# EAGLE board budik-panel (EAGLE 9.2.2)
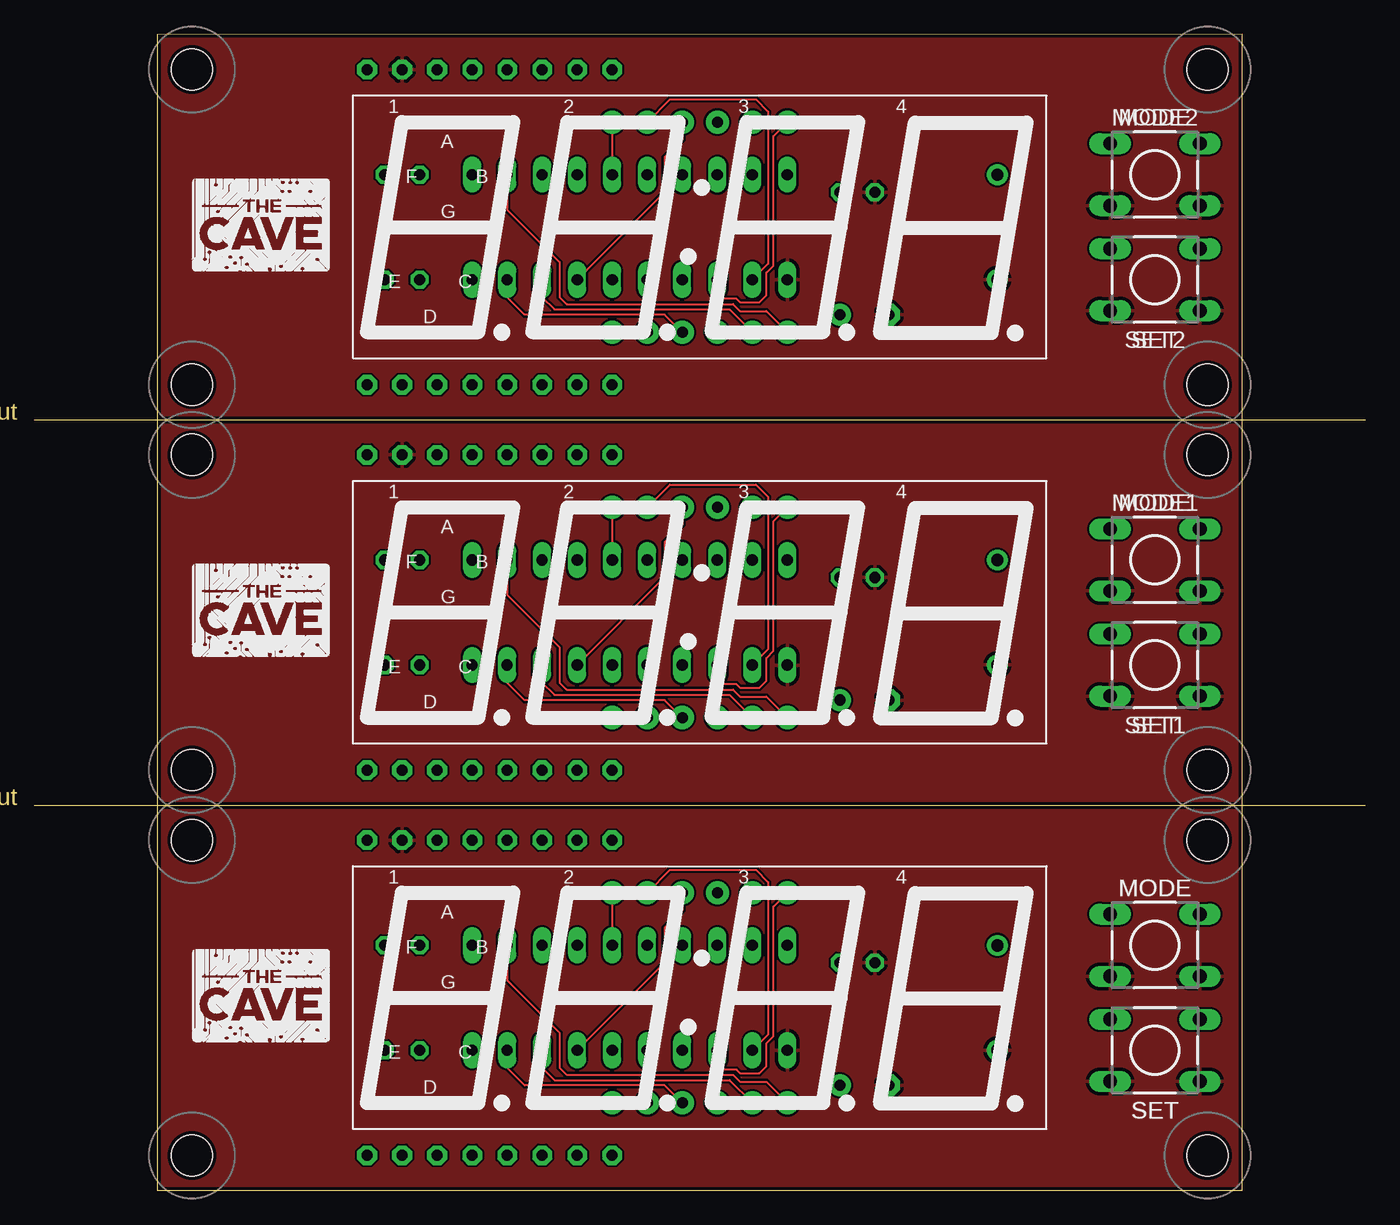
[diagram p0: board, top side]
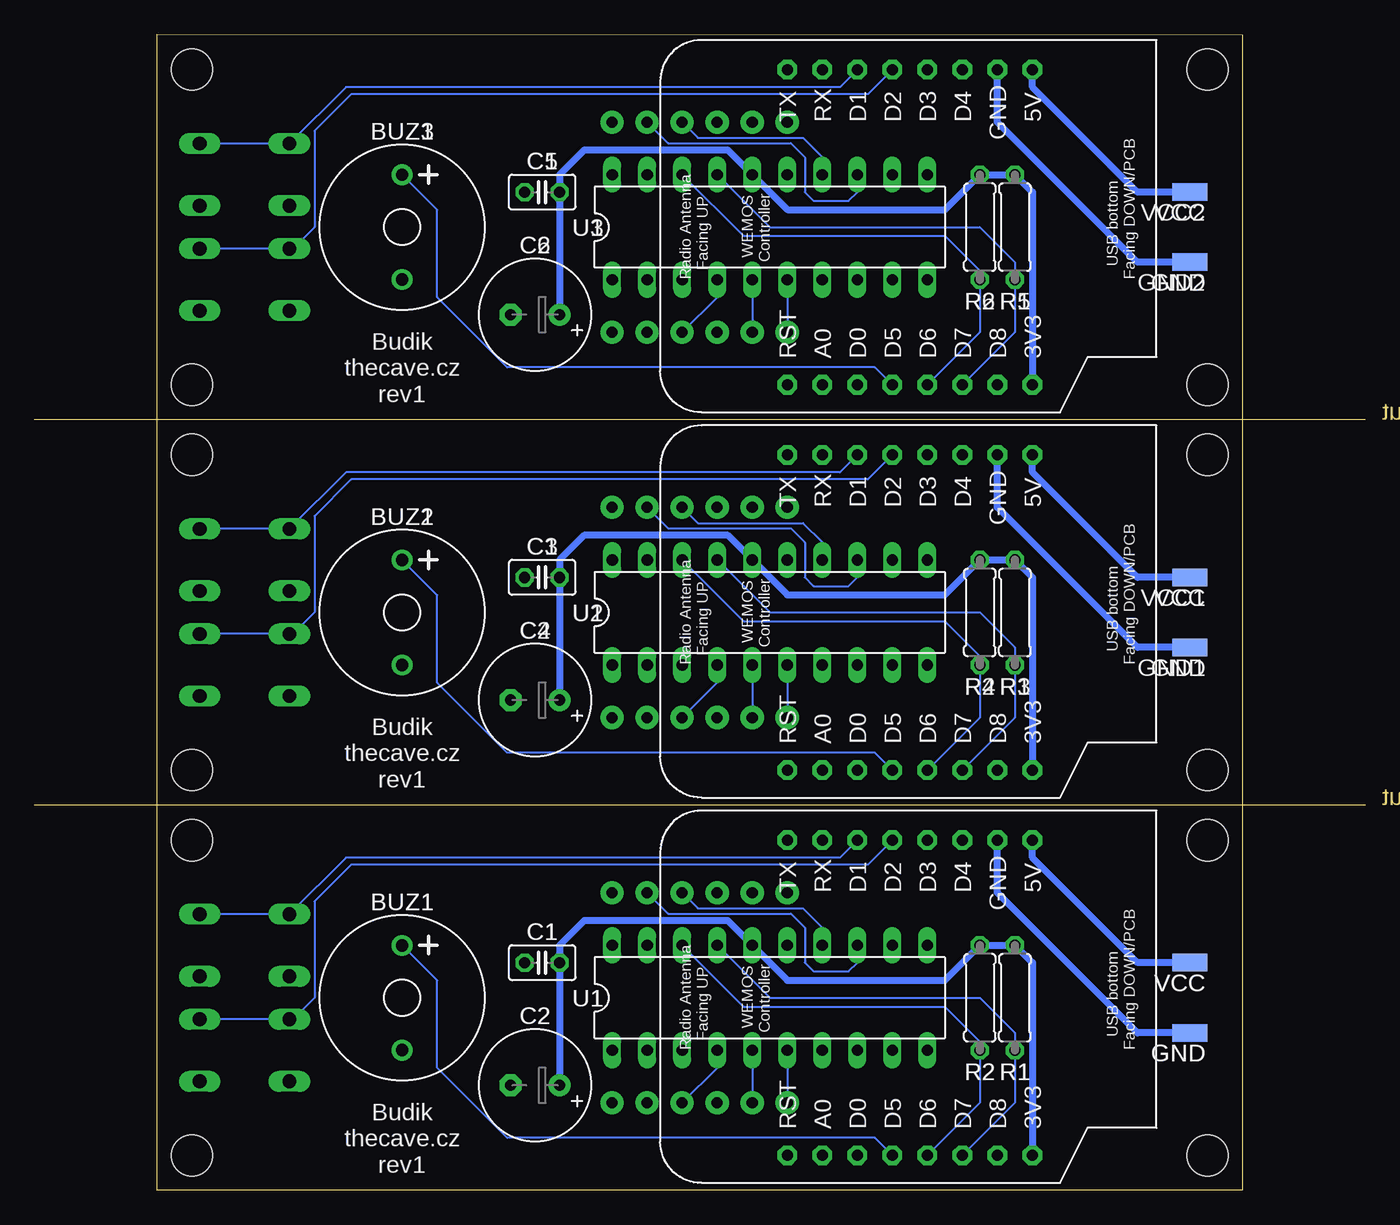
[diagram p1: board, bottom side, seen from below]

Size 96.52 x 83.82 mm. Coordinates in mm from the lower left corner, seen from the top.
Outline: 87.63,27.94 87.63,0.01 8.89,0 8.89,27.94
Outline: 87.63,27.95 87.63,55.88
Outline: 8.89,55.88 8.89,27.94
Outline: 87.63,55.88 87.63,83.82 8.89,83.82 8.89,55.88
Outline: 0,55.88 96.52,55.88
Outline: 0,27.94 96.52,27.94
Copper layers (1*16): Top 0.035mm / dielectric 1.5mm / Bottom 0.035mm
Design rules "SeeedStudio_2layer_DRU_no_angle_20140221": minimum track width 6mil, minimum drill 12mil, track to track 6mil, track to pad 6mil, pad to pad 6mil, via to via 6mil, smd to smd 0mil, copper to edge 10mil, drill to drill 10mil, minimum pad ring 10mil, minimum via ring 6mil, stop-mask expansion 2mil, vias tented up to drill 100mil, thermal gap 10mil
Holes 3 mm at 11.43,25.4 11.43,2.54 85.09,2.54 85.09,25.4 11.43,53.34 11.43,30.48 85.09,30.48 85.09,53.34 11.43,81.28 11.43,58.42 85.09,58.42 85.09,81.28

## Footprints (pad centres in the part's own frame; a part is rotated, then mirrored left to right if it is on the bottom)
BZ2-7.6-D12.0XH6.5MM = drill 0.9 pad 1.5: + -3.8,0; - 3.8,0
C025-025X050 = drill 0.813 octagon: 1 -1.27,0; 2 1.27,0
E3,5-8 = drill 0.813 pad 1.6: + -1.778,0 | drill 0.813 pad 1.6 octagon: - 1.778,0
SMD1,27-2,54 = smd 1.27 x 2.54: 1 0,0
DTS-6 = drill 1 long: 1 -3.25,2.25; 2 3.25,2.25; 3 -3.25,-2.25; 4 3.25,-2.25
0207/7 = drill 0.813 octagon: 1 -3.81,0; 2 3.81,0
DIL20 = drill 0.813 long: 1 -11.43,-3.81; 2 -8.89,-3.81; 3 -6.35,-3.81; 4 -3.81,-3.81; 5 -1.27,-3.81; 6 1.27,-3.81; 7 3.81,-3.81; 8 6.35,-3.81; 9 8.89,-3.81; 10 11.43,-3.81; 11 11.43,3.81; 12 8.89,3.81; 13 6.35,3.81; 14 3.81,3.81; 15 1.27,3.81; 16 -1.27,3.81; 17 -3.81,3.81; 18 -6.35,3.81; 19 -8.89,3.81; 20 -11.43,3.81
DISPLAY = drill 0.8 pad 1.676: A -3.806,7.62; B 6.354,7.62; C 1.274,-7.62; CA1 -6.346,7.62; CA2 1.274,7.62; CA3 3.814,7.62; CA4 6.354,-7.62; D -3.806,-7.62; DP -1.266,-7.62; E -6.346,-7.62; F -1.266,7.62; G 3.814,-7.62
WEMOS = drill 0.8 pad 1.422 octagon: 3V3 0,0; 5V 22.86,0; A0 0,15.24; D0 0,12.7; D1 22.86,12.7; D2 22.86,10.16; D3 22.86,7.62; D4 22.86,5.08; D5 0,10.16; D6 0,7.62; D7 0,5.08; D8 0,2.54; GND 22.86,2.54; RST 0,17.78; RX 22.86,15.24; TX 22.86,17.78

## Placement (x,y rotation side)
BUZ1  KS-12065D03YA  [BZ2-7.6-D12.0XH6.5MM]  69.85,13.97 270 bottom
BUZ2  KS-12065D03YA  [BZ2-7.6-D12.0XH6.5MM]  69.85,41.91 270 bottom
BUZ3  KS-12065D03YA  [BZ2-7.6-D12.0XH6.5MM]  69.85,69.85 270 bottom
C1  100n  [C025-025X050]  59.69,16.51 180 bottom
C2  100u  [E3,5-8]  60.2,7.62 180 bottom
C3  100n  [C025-025X050]  59.69,44.45 180 bottom
C4  100u  [E3,5-8]  60.2,35.56 180 bottom
C5  100n  [C025-025X050]  59.69,72.39 180 bottom
C6  100u  [E3,5-8]  60.2,63.5 180 bottom
GND  [SMD1,27-2,54]  12.7,11.43 90 bottom
GND1  [SMD1,27-2,54]  12.7,39.37 90 bottom
GND2  [SMD1,27-2,54]  12.7,67.31 90 bottom
MODE  DTS-6  [DTS-6]  81.28,17.78 0 top
MODE1  DTS-6  [DTS-6]  81.28,45.72 0 top
MODE2  DTS-6  [DTS-6]  81.28,73.66 0 top
R1  10k  [0207/7]  25.4,13.97 90 bottom
R2  10k  [0207/7]  27.94,13.97 90 bottom
R3  10k  [0207/7]  25.4,41.91 90 bottom
R4  10k  [0207/7]  27.94,41.91 90 bottom
R5  10k  [0207/7]  25.4,69.85 90 bottom
R6  10k  [0207/7]  27.94,69.85 90 bottom
SET  DTS-6  [DTS-6]  81.28,10.16 0 top
SET1  DTS-6  [DTS-6]  81.28,38.1 0 top
SET2  DTS-6  [DTS-6]  81.28,66.04 0 top
U1  TM1637_DIP  [DIL20]  43.18,13.97 0 bottom
U2  TM1637_DIP  [DIL20]  43.18,41.91 0 bottom
U3  TM1637_DIP  [DIL20]  43.18,69.85 0 bottom
U$1  NFD-5642BX  [DISPLAY]  48.26,13.97 0 top
U$2  THECAVE_LOGO_NEW_TOP_SMALL  [NEW_LOGO_SMALL_TOP]  11.43,10.79 0 top
U$3  WEMOS  [WEMOS]  24.13,2.54 90 bottom
U$4  NFD-5642BX  [DISPLAY]  48.26,41.91 0 top
U$5  THECAVE_LOGO_NEW_TOP_SMALL  [NEW_LOGO_SMALL_TOP]  11.43,38.73 0 top
U$6  WEMOS  [WEMOS]  24.13,30.48 90 bottom
U$7  NFD-5642BX  [DISPLAY]  48.26,69.85 0 top
U$8  THECAVE_LOGO_NEW_TOP_SMALL  [NEW_LOGO_SMALL_TOP]  11.43,66.67 0 top
U$9  WEMOS  [WEMOS]  24.13,58.42 90 bottom
VCC  [SMD1,27-2,54]  12.7,16.51 90 bottom
VCC1  [SMD1,27-2,54]  12.7,44.45 90 bottom
VCC2  [SMD1,27-2,54]  12.7,72.39 90 bottom

## Library data of the parts
BUZ1-BUZ3 = Seeed-Connector; MPN: KS-12065D03YA
C1-C6 = rcl; SPICEPREFIX: C
GND GND1 GND2 VCC VCC1 VCC2 = wirepad
MODE MODE1 MODE2 SET SET1 SET2 = switch-tact
R1-R6 = rcl; SPICEPREFIX: R
U1-U3 U$2 U$5 U$8 = thecave
U$1 U$4 U$7 = NFD-5642Xx
U$3 U$6 U$9 = d1-mini

## Nets
+3V1: C3.1 C4.+ R3.2 R4.2 U2.16 U$6.3V3
+3V2: C5.1 C6.+ R5.2 R6.2 U3.16 U$9.3V3
+3V3: C1.1 C2.+ R1.2 R2.2 U1.16 U$3.3V3
BTN1: MODE.1 MODE.2 U$3.D1
BTN2: SET.1 SET.2 U$3.D2
BTN3: MODE1.1 MODE1.2 U$6.D1
BTN4: SET1.1 SET1.2 U$6.D2
BTN5: MODE2.1 MODE2.2 U$9.D1
BTN6: SET2.1 SET2.2 U$9.D2
BUZZ: BUZ1.+ U$3.D5
BUZZ1: BUZ2.+ U$6.D5
BUZZ2: BUZ3.+ U$9.D5
CLK: R2.1 U1.18 U$3.D6
CLK1: R4.1 U2.18 U$6.D6
CLK2: R6.1 U3.18 U$9.D6
DIO: R1.1 U1.17 U$3.D7
DIO1: R3.1 U2.17 U$6.D7
DIO2: R5.1 U3.17 U$9.D7
GND: BUZ1.- C1.2 C2.- GND.1 MODE.3 MODE.4 SET.3 SET.4 U1.1 U$3.GND
GND1: BUZ2.- C3.2 C4.- GND1.1 MODE1.3 MODE1.4 SET1.3 SET1.4 U2.1 U$6.GND
GND2: BUZ3.- C5.2 C6.- GND2.1 MODE2.3 MODE2.4 SET2.3 SET2.4 U3.1 U$9.GND
N$1: U$3.5V VCC.1
N$2: U1.2 U$1.A
N$3: U1.3 U$1.B
N$4: U1.4 U$1.C
N$5: U1.5 U$1.D
N$6: U1.6 U$1.E
N$7: U1.7 U$1.F
N$8: U1.8 U$1.G
N$9: U1.9 U$1.DP
N$10: U1.15 U$1.CA1
N$11: U1.14 U$1.CA2
N$12: U1.13 U$1.CA3
N$13: U1.12 U$1.CA4
N$14: U2.2 U$4.A
N$15: U2.3 U$4.B
N$16: U2.4 U$4.C
N$17: U2.5 U$4.D
N$18: U2.6 U$4.E
N$19: U2.7 U$4.F
N$20: U2.8 U$4.G
N$21: U2.9 U$4.DP
N$22: U2.15 U$4.CA1
N$23: U2.14 U$4.CA2
N$24: U2.13 U$4.CA3
N$25: U2.12 U$4.CA4
N$26: U$6.5V VCC1.1
N$27: U3.2 U$7.A
N$28: U3.3 U$7.B
N$29: U3.4 U$7.C
N$30: U3.5 U$7.D
N$31: U3.6 U$7.E
N$32: U3.7 U$7.F
N$33: U3.8 U$7.G
N$34: U3.9 U$7.DP
N$35: U3.15 U$7.CA1
N$36: U3.14 U$7.CA2
N$37: U3.13 U$7.CA3
N$38: U3.12 U$7.CA4
N$39: U$9.5V VCC2.1

## Tracks (layer width: path | path; a pad name or v marks a point on that pad's centre or on a via)
+3V1
  Bottom 0.508: U$6.3V3 24.13,44.45 R3.2 R4.2 30.48,43.18 41.91,43.18 U2.16 46.23,47.5 56.64,47.5 58.42,45.72 C3.1 C4.+
+3V2
  Bottom 0.508: U$9.3V3 24.13,72.39 R5.2 R6.2 30.48,71.12 41.91,71.12 U3.16 46.23,75.44 56.64,75.44 58.42,73.66 C5.1 C6.+
+3V3
  Bottom 0.508: U$3.3V3 24.13,16.51 R1.2 R2.2 30.48,15.24 41.91,15.24 U1.16 46.23,19.56 56.64,19.56 58.42,17.78 C1.1 C2.+
BTN1
  Bottom 0.152: U$3.D1 38.1,24.13 73.93,24.13 MODE.1 MODE.2
BTN2
  Bottom 0.152: U$3.D2 36.07,23.62 73.53,23.62 76.2,20.95 76.2,13.97 77.76,12.41 SET.1 SET.2
BTN3
  Bottom 0.152: U$6.D1 38.1,52.07 73.93,52.07 MODE1.1 MODE1.2
BTN4
  Bottom 0.152: U$6.D2 36.07,51.56 73.53,51.56 76.2,48.9 76.2,41.91 77.76,40.35 SET1.1 SET1.2
BTN5
  Bottom 0.152: U$9.D1 38.1,80.01 73.93,80.01 MODE2.1 MODE2.2
BTN6
  Bottom 0.152: U$9.D2 36.07,79.5 73.53,79.5 76.2,76.83 76.2,69.85 77.76,68.29 SET2.1 SET2.2
BUZZ
  Bottom 0.152: U$3.D5 35.56,3.81 62.23,3.81 67.31,8.89 67.31,15.23 BUZ1.+
BUZZ1
  Bottom 0.152: U$6.D5 35.56,31.75 62.23,31.75 67.31,36.83 67.31,43.17 BUZ2.+
BUZZ2
  Bottom 0.152: U$9.D5 35.56,59.69 62.23,59.69 67.31,64.77 67.31,71.11 BUZ3.+
CLK
  Bottom 0.152: U1.18 45.09,13.34 30.48,13.34 27.94,10.79 R2.1 27.94,6.35 U$3.D6
CLK1
  Bottom 0.152: U2.18 45.09,41.27 30.48,41.27 27.94,38.73 R4.1 27.94,34.29 U$6.D6
CLK2
  Bottom 0.152: U3.18 45.09,69.22 30.48,69.22 27.94,66.67 R6.1 27.94,62.23 U$9.D6
DIO
  Bottom 0.152: U1.17 43.18,13.97 27.94,13.97 25.4,11.43 R1.1 25.4,6.35 U$3.D7
DIO1
  Bottom 0.152: U2.17 43.18,41.91 27.94,41.91 25.4,39.37 R3.1 25.4,34.29 U$6.D7
DIO2
  Bottom 0.152: U3.17 43.18,69.85 27.94,69.85 25.4,67.31 R5.1 25.4,62.23 U$9.D7
GND
  Bottom 0.508: GND.1 16.51,11.43 26.67,21.59 U$3.GND
  pour Top: 8.89,27.94 8.89,0 87.63,0 87.63,27.94
GND1
  Bottom 0.508: GND1.1 16.51,39.37 26.67,49.53 U$6.GND
  pour Top: 8.89,55.88 8.89,27.94 87.63,27.94 87.63,55.88
GND2
  Bottom 0.508: GND2.1 16.51,67.31 26.67,77.47 U$9.GND
  pour Top: 8.89,83.82 8.89,55.88 87.63,55.88 87.63,83.82
N$1
  Bottom 0.508: VCC.1 16.51,16.51 24.13,24.13 U$3.5V
N$2
  Top 0.152: U$1.A 46.1,23.24 52.32,23.24 53.21,22.35 53.21,11.3 U1.2
N$3
  Top 0.152: U$1.B 53.59,20.57 53.59,11.18 53.09,10.67 53.09,9.02 52.58,8.51 51.18,8.51 50.93,8.76 49.78,8.76 49.53,9.02 U1.3
N$4
  Bottom 0.152: U$1.C 46.99,8.89 U1.4
N$5
  Bottom 0.152: U1.5 U$1.D
N$6
  Bottom 0.152: U1.6 U$1.E
N$7
  Top 0.152: U$1.F 46.99,20.32 45.72,19.05 45.72,16.51 U1.7
N$8
  Top 0.152: U1.8 36.83,8.89 37.72,8 50.42,8 U$1.G
N$9
  Top 0.152: U$1.DP 45.72,7.62 35.56,7.62 34.29,8.89 U1.9
N$10
  Top 0.152: U$1.CA1 U1.15
N$11
  Bottom 0.152: U$1.CA2 48.39,20.45 40.77,20.45 39.37,19.05 U1.14
N$12
  Bottom 0.152: U$1.CA3 50.55,20.07 41.66,20.07 40.64,19.05 40.64,16.51 40,15.88 37.47,15.88 36.83,16.51 U1.13
N$13
  Top 0.152: U1.12 34.29,15.24 38.1,11.43 38.1,8.89 38.61,8.38 50.67,8.38 51.18,7.87 53.09,7.87 U$1.CA4
N$14
  Top 0.152: U$4.A 46.1,51.18 52.32,51.18 53.21,50.29 53.21,39.24 U2.2
N$15
  Top 0.152: U$4.B 53.59,48.51 53.59,39.12 53.09,38.61 53.09,36.96 52.58,36.45 51.18,36.45 50.93,36.7 49.78,36.7 49.53,36.96 U2.3
N$16
  Bottom 0.152: U$4.C 46.99,36.83 U2.4
N$17
  Bottom 0.152: U2.5 U$4.D
N$18
  Bottom 0.152: U2.6 U$4.E
N$19
  Top 0.152: U$4.F 46.99,48.26 45.72,46.99 45.72,44.45 U2.7
N$20
  Top 0.152: U2.8 36.83,36.83 37.72,35.94 50.42,35.94 U$4.G
N$21
  Top 0.152: U$4.DP 45.72,35.56 35.56,35.56 34.29,36.83 U2.9
N$22
  Top 0.152: U$4.CA1 U2.15
N$23
  Bottom 0.152: U$4.CA2 48.39,48.39 40.77,48.39 39.37,46.99 U2.14
N$24
  Bottom 0.152: U$4.CA3 50.55,48.01 41.66,48.01 40.64,46.99 40.64,44.45 40,43.81 37.47,43.81 36.83,44.45 U2.13
N$25
  Top 0.152: U2.12 34.29,43.18 38.1,39.37 38.1,36.83 38.61,36.32 50.67,36.32 51.18,35.81 53.09,35.81 U$4.CA4
N$26
  Bottom 0.508: VCC1.1 16.51,44.45 24.13,52.07 U$6.5V
N$27
  Top 0.152: U$7.A 46.1,79.12 52.32,79.12 53.21,78.23 53.21,67.18 U3.2
N$28
  Top 0.152: U$7.B 53.59,76.45 53.59,67.06 53.09,66.55 53.09,64.9 52.58,64.39 51.18,64.39 50.93,64.64 49.78,64.64 49.53,64.9 U3.3
N$29
  Bottom 0.152: U$7.C 46.99,64.77 U3.4
N$30
  Bottom 0.152: U3.5 U$7.D
N$31
  Bottom 0.152: U3.6 U$7.E
N$32
  Top 0.152: U$7.F 46.99,76.2 45.72,74.93 45.72,72.39 U3.7
N$33
  Top 0.152: U3.8 36.83,64.77 37.72,63.88 50.42,63.88 U$7.G
N$34
  Top 0.152: U$7.DP 45.72,63.5 35.56,63.5 34.29,64.77 U3.9
N$35
  Top 0.152: U$7.CA1 U3.15
N$36
  Bottom 0.152: U$7.CA2 48.39,76.33 40.77,76.33 39.37,74.93 U3.14
N$37
  Bottom 0.152: U$7.CA3 50.55,75.95 41.66,75.95 40.64,74.93 40.64,72.39 40,71.75 37.47,71.75 36.83,72.39 U3.13
N$38
  Top 0.152: U3.12 34.29,71.12 38.1,67.31 38.1,64.77 38.61,64.26 50.67,64.26 51.18,63.75 53.09,63.75 U$7.CA4
N$39
  Bottom 0.508: VCC2.1 16.51,72.39 24.13,80.01 U$9.5V

## Text on the board
Dimension: v-cut | v-cut
bPlace: Budik / thecave.cz / rev1 | Budik / thecave.cz / rev1 | Budik / thecave.cz / rev1
_tNames: MODE | SET | MODE | SET | MODE | SET
_bNames: BUZ1 | C1 | VCC | U1 | C2 | GND | R1 | R2 | BUZ1 | C1 | VCC | U1 | C2 | GND | R1 | R2 | BUZ1 | C1 | VCC | U1 | C2 | GND | R1 | R2